# EAGLE board Configuration_Board (EAGLE 6.3)
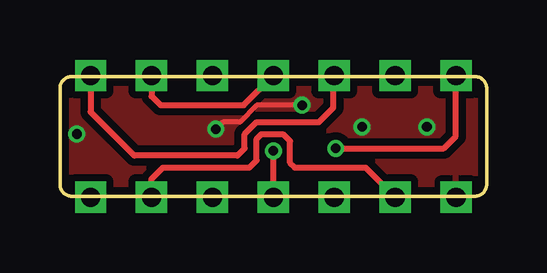
[diagram p0: board, top side]
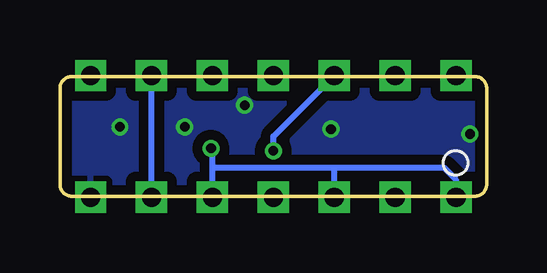
[diagram p1: board, bottom side, seen from below]

Size 17.8 x 5 mm. Coordinates in mm from the lower left corner, seen from the top.
Outline: 17.8,4.5 17.8,0.5 arc-90 17.3,0 0.5,0 arc-90 0,0.5 0,4.5 arc-90 0.5,5 17.3,5 arc-90 17.8,4.5
Copper layers (1*16): Top 0.035mm / dielectric 1.5mm / Bottom 0.035mm
Design rules "Fusion_eagle_rule_v1.1": minimum track width 6mil, minimum drill 12mil, track to track 6mil, track to pad 6mil, pad to pad 6mil, via to via 6mil, smd to smd 0mil, copper to edge 10mil, drill to drill 10mil, minimum pad ring 10mil, minimum via ring 6mil, stop-mask expansion 2mil, vias tented up to drill 100mil, thermal gap 10mil

## Footprints (pad centres in the part's own frame; a part is rotated, then mirrored left to right if it is on the bottom)
CONFIGURATION_BRD_MOD = drill 0.8 square: 1-IC -7.62,-2.54; 1-OC -7.62,2.54; 2-IC -5.08,-2.54; 2-OC -5.08,2.54; 3-IC -2.54,-2.54; 3-OC 0,-2.54; 4-IC 2.54,-2.54; 4-OC 5.08,-2.54; B1 -2.54,2.54; GND 7.62,-2.54; IN- 7.62,2.54; M1 0,2.54; N1 2.54,2.54; N2 5.08,2.54

## Placement (x,y rotation side)
U$1  CONFIGURATION_BRD_  [CONFIGURATION_BRD_MOD]  8.9,2.5 0 top

## Library data of the parts
U$1 = CYCFI_Module_castellated

## Nets
B1: U$1.3-OC U$1.B1
GND: U$1.GND
IN-: U$1.1-IC U$1.3-IC U$1.4-IC U$1.IN-
M1: U$1.2-OC U$1.M1
N1: U$1.1-OC U$1.N1
N2: U$1.2-IC U$1.4-OC U$1.N2

## Tracks (layer width: path | path; a pad name or v marks a point on that pad's centre or on a via)
B1  (via drill 0.4)
  Top 0.254: U$1.3-OC v8.9,1.9
  Bottom 0.254: v8.9,1.9 8.9,2.5 U$1.B1
GND  (via drill 0.4)
  Top 0.203: v10.1,3.8 8.2,3.8 7.5,3.1 6.8,3.1 v6.5,2.8
  other vias: 15.3,2.9 12.6,2.9 0.7,2.6
  pour Bottom (isolate 0.406): 0,5 0,0.1 0,0 17.8,0 17.8,5
  pour Top (isolate 0.305): 0,5 0,0 17.8,0 17.8,5
IN-  (via drill 0.4)
  Top 0.254: v11.5,2 16,2 16.5,2.5 16.5,5.02 U$1.IN-
  Bottom 0.254: 11.44,1.2 6.3,1.2 | 6.3,1.2 1.8,1.2 1.3,0.7 1.3,-0.02 U$1.1-IC | U$1.3-IC 6.36,1.14 6.3,1.2 | U$1.4-IC 11.44,1.2 | 11.44,1.2 11.44,1.94 v11.5,2
M1
  Top 0.254: U$1.2-OC 3.82,4.18 4.2,3.8 7.66,3.8 U$1.M1
N1
  Top 0.254: U$1.1-OC 1.28,3.52 3.1,1.7 7.4,1.7 7.7,2 7.7,2.6 8.2,3.1 10.8,3.1 11.4,3.7 11.4,5 U$1.N1
N2
  Top 0.254: U$1.2-IC 3.82,0.72 4.3,1.2 7.9,1.2 8.2,1.5 8.2,2.4 8.4,2.6 9.3,2.6 9.6,2.3 9.6,1.4 9.8,1.2 12.74,1.2 U$1.4-OC
  Bottom 0.254: U$1.4-OC U$1.N2